# Altium PCB Copy of PCB1.PcbDoc (part 7 of 9)
Units mm, origin at the board's own origin, x right, y up, seen from the top; angles counter-clockwise.
Board outline 100 x 100 mm, 6 copper layers (Top Layer, Int1 (GND), Int2 (Sign), Int3 (Sign), Int4 (PWR), Bottom Layer), stack 1.538 mm thick; 614 components, 712 nets, 3013 pads, 501 vias.
Unrouted connection lines stored in the file: 259.
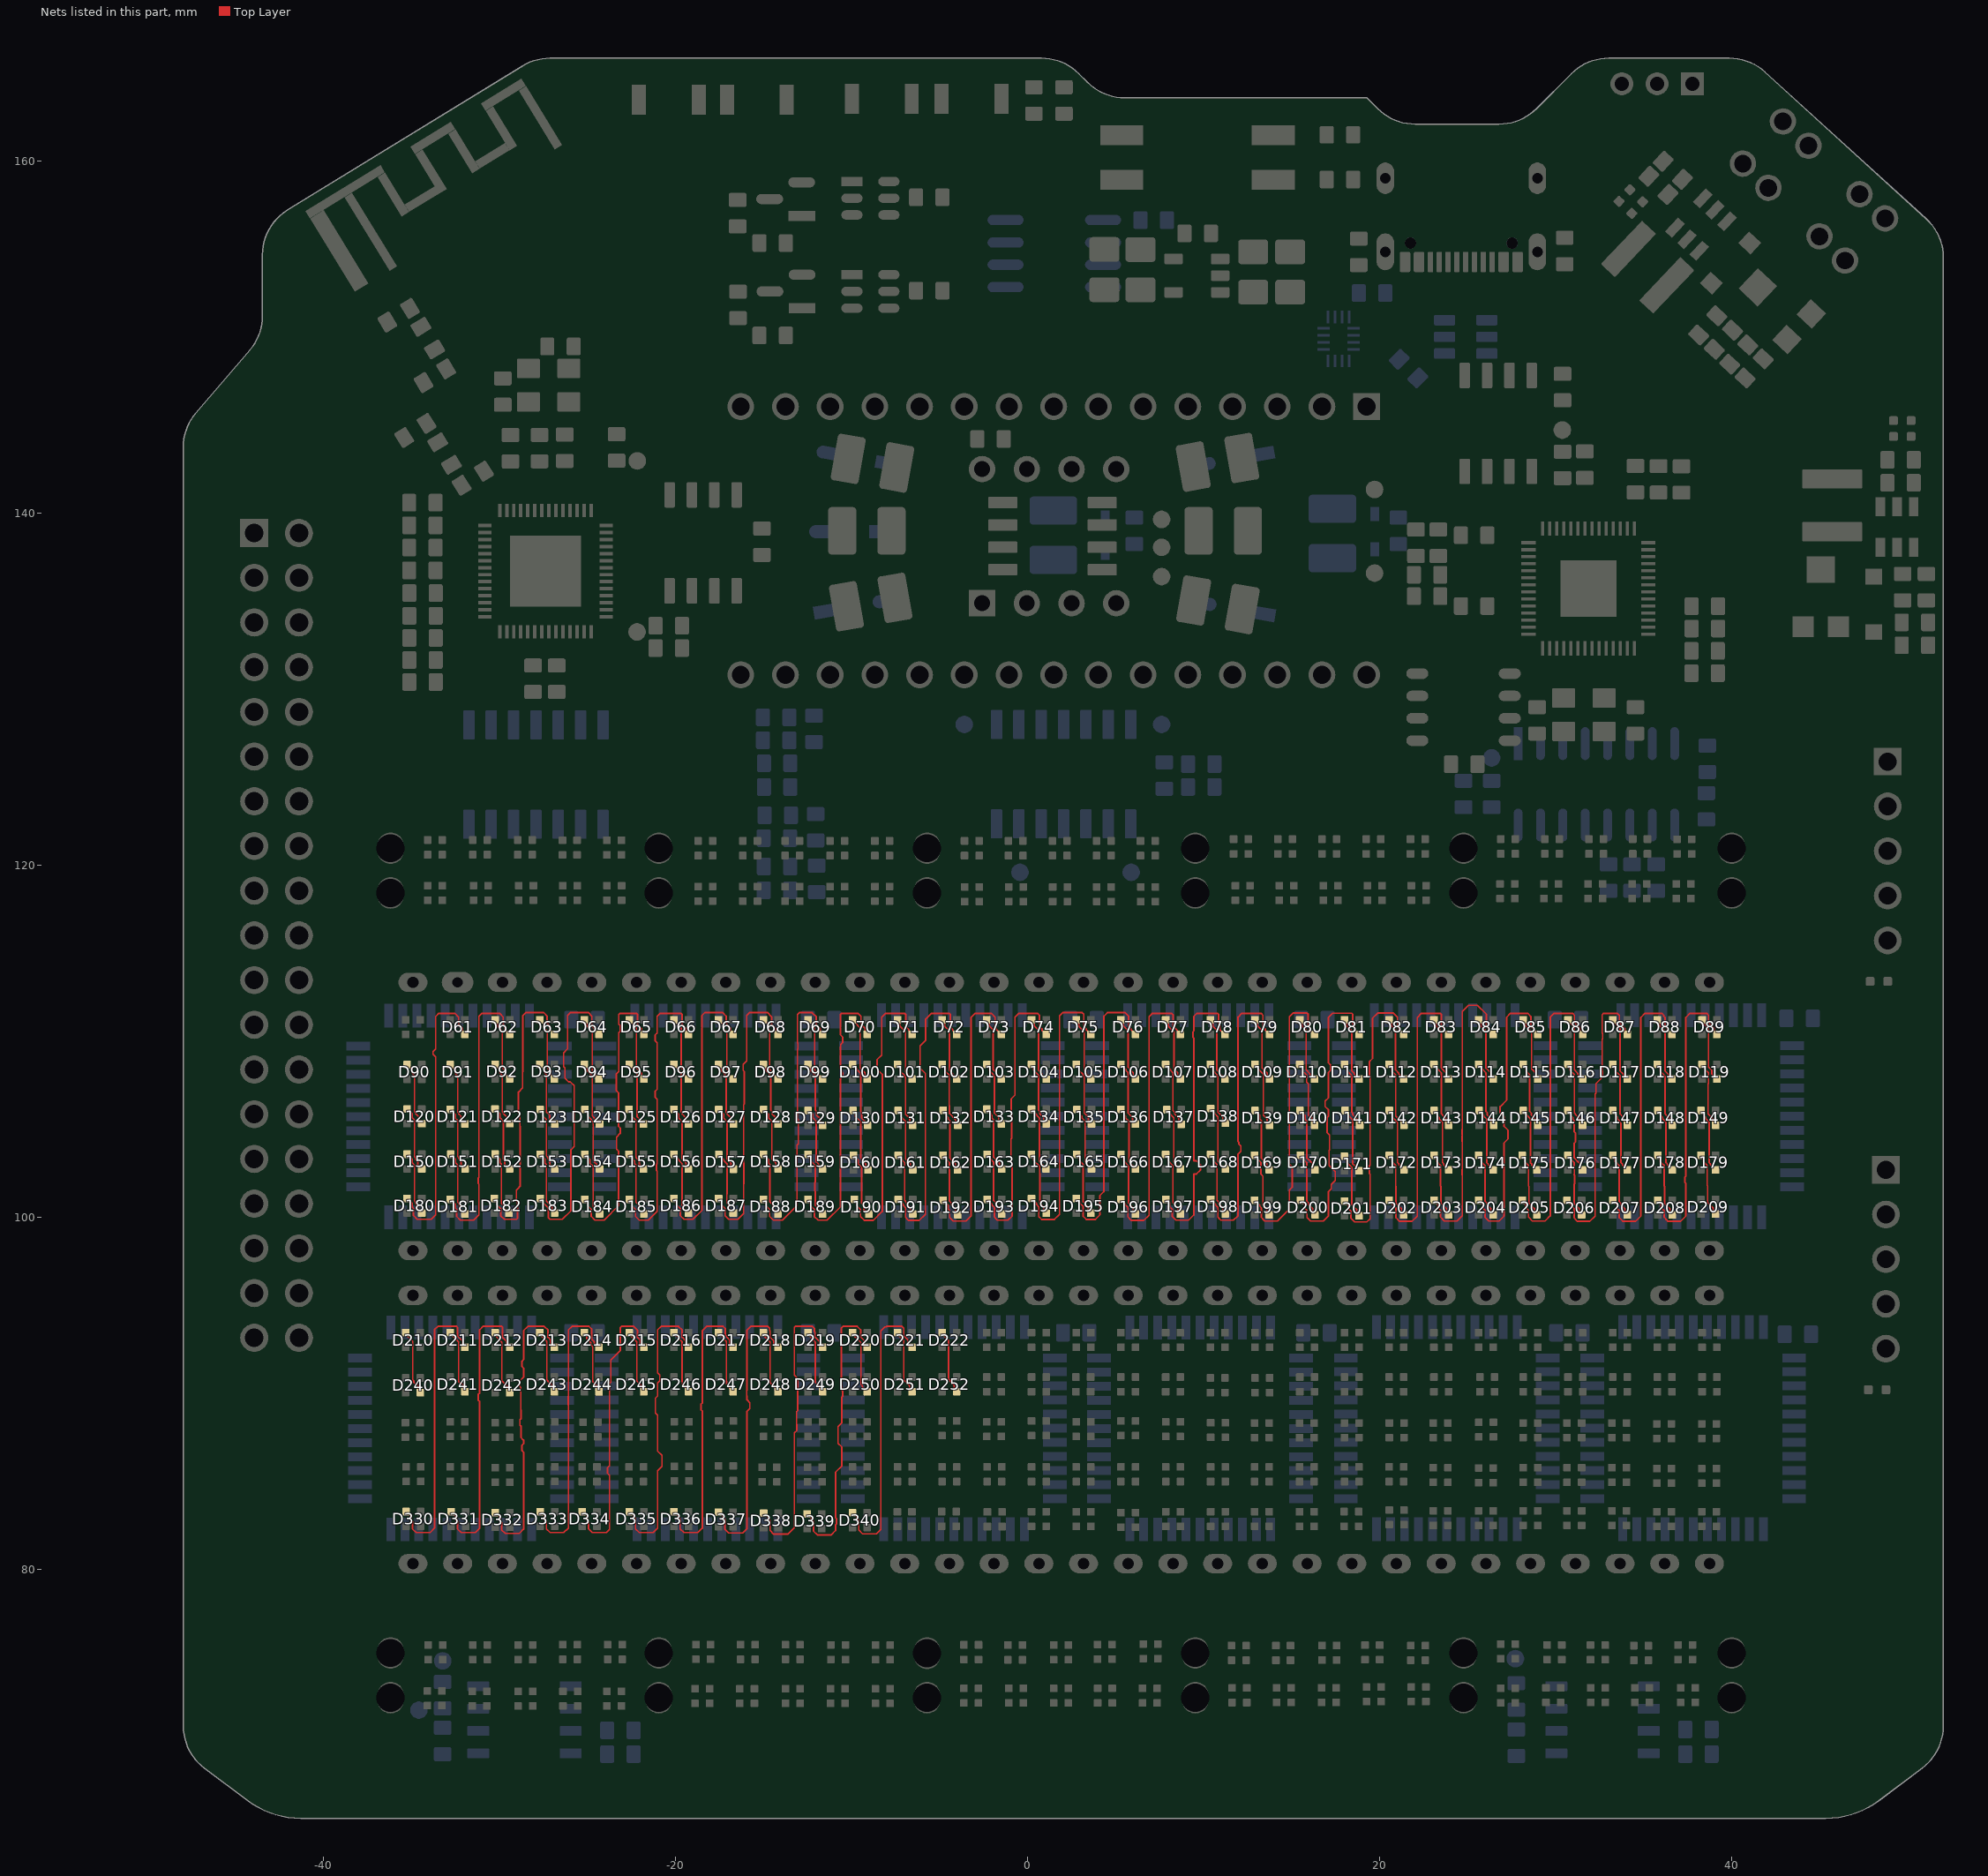
[diagram p10: the nets of this part, all layers, seen from the top]

## Via types
v1: diameter 0.4, hole 0.3, Top Layer to Bottom Layer, tented both sides, 494 vias
v2: diameter 0.4, hole 0.3, Top Layer to Bottom Layer, 5 vias
v3: diameter 0.4, hole 0.3, Top Layer to Bottom Layer, tented top, 1 vias
v4: diameter 0.6, hole 0.5, Top Layer to Bottom Layer, 1 vias

## Nets (pads, with @x,y where several pads share a name; then routed paths per layer and width w, separated by ;. In a path a pad name is that pad's centre, name@x,y a point inside that pad or via, vN(x,y) a via of type N, cw(c..) or ccw(c..) an arc to the next point about the centre after c; other vN are vias at no path point) (continued)
NetD61_3: D61.4 D180.1 | length 16.4
  Top Layer w0.09: D180.1@-35.26,101.083 -34.98,100.803 -34.98,100.589 -34.9,100.509 -34.9,100.107 -34.687,99.893 -33.892,99.893 -33.645,100.14 -33.645,109.129 -33.794,109.278 -33.794,109.42 -33.645,109.569 -33.645,111.415 -33.469,111.591 -32.551,111.591 -32.337,111.377 -32.337,110.975 -32.115,110.752 -32.115,110.571 -32.104,110.56 D61.4@-32.083,110.56
NetD62_1: D62.1 D92.4 | length 3.7
  Top Layer w0.09: D62.1@-30.267,111.231 -30.13,111.093 -30.13,110.879 -29.907,110.657 -29.907,110.602 -29.852,110.547 -29.852,108.557 -29.797,108.502 -29.797,108.447 -29.662,108.312 -29.662,108.099 D92.4@-29.437,107.874
NetD62_3: D62.4 D181.1 | length 16.6
  Top Layer w0.09: D181.1@-32.81,101.033 -32.53,100.753 -32.53,100.539 -32.45,100.459 -32.45,100.057 -32.237,99.843 -31.482,99.843 -31.185,100.14 -31.185,101.888 -31.221,101.924 -31.221,102.232 -31.185,102.269 -31.185,111.42 -31.011,111.594 -30.014,111.594 -29.809,111.389 -29.809,110.987 -29.717,110.895 -29.717,110.681 D62.4@-29.437,110.401
NetD63_1: D63.1 D93.4 | length 3.7
  Top Layer w0.09: D63.1@-27.727,111.231 -27.499,111.002 -27.499,110.789 -27.367,110.657 -27.367,110.578 -27.295,110.506 -27.295,108.54 -27.257,108.502 -27.257,108.447 -27.105,108.295 -27.105,108.089 D93.4@-26.88,107.864
NetD63_3: D63.4 D182.1 | length 16.7
  Top Layer w0.09: D182.1@-30.31,101.08 -30.172,100.942 -30.172,100.728 -29.95,100.506 -29.95,100.104 -29.736,99.89 -29.045,99.89 -28.992,99.943 -28.992,100.864 -29.057,100.929 -29.057,101.556 -28.956,101.657 ; -28.956,101.657 -28.848,101.765 -28.848,105.167 -28.854,105.172 -28.854,105.866 -28.939,105.951 -28.939,107.123 -28.703,107.359 -28.703,108.267 -28.697,108.273 -28.685,108.286 -28.685,111.467 -28.511,111.641 -27.514,111.641 -27.309,111.436 -27.309,111.026 -27.177,110.895 -27.177,110.681 D63.4@-26.897,110.401
NetD64_1: D64.1 D94.4 | length 3.7
  Top Layer w0.09: D64.1@-25.16,111.221 -25.05,111.11 -25.05,110.879 -24.827,110.657 -24.827,110.602 -24.745,110.52 -24.745,108.304 -24.555,108.114 -24.555,108.089 -24.527,108.061 -24.527,108.031 D94.4@-24.36,107.864
NetD64_3: D64.4 D183.1 | length 17.1
  Top Layer w0.09: D183.1@-27.708,101.08 -27.54,100.913 -27.54,100.85 -27.24,100.55 -27.24,99.987 -27.143,99.89 -26.442,99.89 -25.96,100.371 -25.96,103.837 -25.776,104.021 -25.776,107.487 -25.994,107.705 -26.092,107.705 -26.293,107.906 -26.293,108.487 -26.375,108.568 -26.375,109.352 -26.145,109.582 -26.145,111.467 -25.971,111.641 -24.974,111.641 -24.769,111.436 -24.769,110.867 -24.637,110.736 -24.637,110.681 D64.4@-24.357,110.401
NetD65_1: D65.1 D95.4 | length 3.7
  Top Layer w0.09: D65.1@-22.621,111.181 -22.598,111.181 -22.477,111.061 -22.477,111.038 -22.367,110.928 -22.367,110.896 -22.232,110.761 -22.232,108.49 -21.955,108.212 -21.955,107.959 D95.4@-21.82,107.824
NetD65_3: D65.4 D184.1 | length 16.8
  Top Layer w0.09: D184.1@-25.129,101.033 -25.023,100.926 -25.023,100.681 -24.8,100.459 -24.8,100.057 -24.587,99.843 -24.074,99.843 -23.25,100.667 -23.25,103.765 -23.362,103.877 -23.362,104.565 -23.154,104.773 -23.154,105.081 -23.25,105.177 -23.25,107.074 -23.374,107.198 -23.374,108.161 -23.235,108.301 -23.235,110.497 -23.148,110.584 -23.148,110.892 -23.235,110.978 -23.235,111.534 -23.175,111.594 -22.23,111.594 -22.177,111.541 -22.177,110.975 -21.955,110.752 -21.955,110.53 D65.4@-21.779,110.354
NetD66_1: D66.1 D96.4 | length 3.7
  Top Layer w0.09: D66.1@-20.107,111.206 -20.082,111.206 -19.937,111.061 -19.937,111.036 -19.827,110.926 -19.827,110.896 -19.692,110.761 -19.692,108.49 -19.502,108.299 -19.502,108.074 D96.4@-19.277,107.849
NetD66_3: D66.4 D185.1 | length 16.8
  Top Layer w0.09: D185.1@-22.616,101.033 -22.51,100.926 -22.51,100.681 -22.287,100.459 -22.287,100.057 -22.074,99.843 -21.561,99.843 -21.053,100.351 -21.053,102.626 -21.102,102.675 -21.102,102.983 -21.085,103 -21.085,103.028 -21.053,103.06 -21.053,106.723 -21.177,106.847 -21.177,107.155 -21.053,107.278 -21.053,109.928 -21.177,110.051 -21.177,110.36 -21.053,110.483 -21.053,111.42 -20.879,111.594 -19.694,111.594 -19.637,111.537 -19.637,110.975 -19.415,110.752 -19.415,110.503 D66.4@-19.266,110.354
NetD67_1: D67.1 D97.4 | length 3.7
  Top Layer w0.09: D67.1@-17.557,111.206 -17.542,111.206 -17.397,111.061 -17.397,111.046 -17.287,110.936 -17.287,110.737 -17.097,110.547 -17.097,108.435 -17.017,108.355 -17.017,108.139 -16.909,108.031 -16.907,108.031 -16.727,107.851 D97.4@-16.727,107.849
NetD67_3: D67.4 D186.1 | length 16.5
  Top Layer w0.09: D186.1@-20.076,101.083 -19.97,100.976 -19.97,100.731 -19.747,100.509 -19.747,100.107 -19.534,99.893 -19.021,99.893 -18.513,100.401 -18.513,111.47 -18.339,111.644 -17.343,111.644 -17.138,111.439 -17.138,111.055 -17.097,111.015 -17.097,110.975 -16.875,110.752 -16.875,110.553 D67.4@-16.726,110.404
NetD68_1: D68.1 D98.4 | length 3.7
  Top Layer w0.09: D68.1@-15.012,111.219 -15.012,111.215 -14.857,111.061 -14.853,111.061 -14.747,110.955 -14.747,110.737 -14.667,110.657 -14.667,108.404 -14.472,108.209 -14.472,108.152 -14.364,108.044 -14.362,108.044 -14.182,107.864 D98.4@-14.182,107.862
NetD68_3: D68.4 D187.1 | length 16.5
  Top Layer w0.09: D187.1@-17.532,101.082 -17.425,100.975 -17.425,100.73 -17.203,100.508 -17.203,100.105 -16.989,99.892 -16.477,99.892 -16.143,100.225 -16.143,101.891 -16.139,101.896 -16.139,103.09 -16.143,103.094 -16.143,106.402 -16.108,106.438 -16.108,108.294 -16.168,108.355 -16.168,108.692 -15.969,108.891 -15.969,111.469 -15.795,111.643 -14.798,111.643 -14.557,111.402 -14.557,110.975 -14.335,110.752 -14.335,110.556 D68.4@-14.182,110.402
NetD69_1: D69.1 D99.4 | length 3.7
  Top Layer w0.09: D69.1@-12.487,111.222 -12.479,111.222 -12.317,111.061 -12.317,111.052 -12.207,110.942 -12.207,110.896 -12.105,110.794 -12.105,108.37 -11.882,108.147 -11.882,108.086 -11.662,107.865 D99.4@-11.657,107.865
NetD69_3: D69.4 D188.1 | length 16.4
  Top Layer w0.09: D188.1@-14.996,101.033 -14.89,100.926 -14.89,100.681 -14.667,100.459 -14.667,100.057 -14.454,99.843 -13.941,99.843 -13.117,100.667 -13.117,104.1 -13.039,104.178 -13.039,105.573 -13.09,105.624 -13.09,109.55 -13.061,109.579 -13.061,109.887 -13.09,109.915 -13.09,111.531 -12.987,111.634 -12.254,111.634 -12.017,111.397 -12.017,110.975 -11.795,110.752 -11.795,110.503 D69.4@-11.646,110.354
NetD70_1: D70.1 D100.4 | length 3.7
  Top Layer w0.09: D70.1@-9.91,111.171 -9.887,111.171 -9.777,111.061 -9.777,111.038 -9.667,110.928 -9.667,110.896 -9.532,110.761 -9.532,108.49 -9.255,108.212 -9.255,107.99 D100.4@-9.08,107.816
NetD70_3: D70.4 D189.1 | length 16.6
  Top Layer w0.09: D189.1@-12.456,101.032 -12.35,100.925 -12.35,100.68 -12.127,100.458 -12.127,100.056 -11.914,99.842 -11.401,99.842 -10.641,100.602 -10.641,107.852 cw(c-10.551,107.852) -10.617,107.913 ccw(c-10.891,108.166) -10.618,108.419 cw(c-10.551,108.479) -10.641,108.479 -10.641,109.696 -10.628,109.709 -10.628,109.831 -10.519,109.941 -10.519,110.249 -10.641,110.372 -10.641,111.541 -10.589,111.593 -9.643,111.593 -9.477,111.428 -9.477,110.975 -9.255,110.752 -9.255,110.502 D70.4@-9.106,110.353
NetD71_1: D71.1 D101.4 | length 3.7
  Top Layer w0.09: D71.1@-7.36,111.171 -7.27,111.08 -7.27,110.879 -7.047,110.657 -7.047,110.643 -6.945,110.541 -6.945,108.285 -6.821,108.161 -6.821,108.104 -6.712,107.996 -6.711,107.996 D101.4@-6.53,107.816
NetD71_3: D71.4 D190.1 | length 16.8
  Top Layer w0.09: D190.1@-9.829,101.023 -9.723,100.916 -9.723,100.671 -9.5,100.449 -9.5,100.047 -9.287,99.833 -8.774,99.833 -8.266,100.341 -8.266,108.132 -8.565,108.431 -8.565,108.958 -8.304,109.22 -8.304,111.373 -8.092,111.584 -7.67,111.584 -7.664,111.591 -7.151,111.591 -7.144,111.584 -6.99,111.584 -6.937,111.531 -6.937,110.975 -6.891,110.928 -6.891,110.81 -6.759,110.679 -6.759,110.624 D71.4@-6.479,110.344
NetD72_1: D72.1 D102.4 | length 3.7
  Top Layer w0.09: D72.1@-4.81,111.171 -4.73,111.09 -4.73,110.879 -4.452,110.602 -4.452,108.342 -4.271,108.161 -4.271,108.104 -4.162,107.996 -4.161,107.996 D102.4@-3.98,107.816
NetD72_3: D72.4 D191.1 | length 16.8
  Top Layer w0.09: D191.1@-7.329,100.992 -7.08,100.743 -7.08,100.688 -6.945,100.553 -6.945,100.013 -6.89,99.958 -6.89,99.937 -6.787,99.833 -6.17,99.833 -5.822,100.181 -5.822,108.181 -6.117,108.476 -6.117,109.748 -5.803,110.062 -5.803,111.27 -5.488,111.584 -5.13,111.584 -5.124,111.591 -4.611,111.591 -4.604,111.584 -4.45,111.584 -4.397,111.531 -4.397,110.975 -4.391,110.968 -4.391,110.81 -4.259,110.679 -4.259,110.624 D72.4@-3.979,110.344
NetD73_1: D73.1 D103.4 | length 3.7
  Top Layer w0.09: D73.1@-2.31,111.211 -2.19,111.09 -2.19,110.879 -1.967,110.657 -1.967,108.397 -1.771,108.201 -1.771,108.144 -1.662,108.036 -1.661,108.036 D103.4@-1.48,107.856
NetD73_3: D73.4 D192.1 | length 16.6
  Top Layer w0.09: D192.1@-4.779,100.983 -4.779,100.952 -4.53,100.703 -4.53,100.489 -4.438,100.397 -4.438,99.995 -4.237,99.793 -3.513,99.793 -3.216,100.09 -3.216,111.37 -2.995,111.591 -2.071,111.591 -1.857,111.377 -1.857,110.975 -1.841,110.958 -1.841,110.799 -1.777,110.736 -1.777,110.681 -1.429,110.332 D73.4@-1.429,110.304
NetD74_1: D74.1 D104.4 | length 3.7
  Top Layer w0.09: D74.1@0.2,111.228 0.365,111.064 0.365,110.881 0.615,110.63 0.615,108.343 0.805,108.153 0.805,108.098 1.03,107.873 D104.4@1.03,107.871
NetD74_3: D74.4 D193.1 | length 16.6
  Top Layer w0.09: D193.1@-2.31,101.033 -2.03,100.753 -2.03,100.698 -1.896,100.564 -1.896,100.024 -1.84,99.968 -1.84,99.947 -1.737,99.843 -1.125,99.843 -0.893,100.075 -0.893,103.093 -0.95,103.15 -0.95,104.453 -0.91,104.493 -0.91,105.859 -0.944,105.892 -0.944,106.735 -0.729,106.95 -0.729,111.379 -0.514,111.594 0.553,111.594 0.659,111.487 0.659,110.855 0.805,110.709 0.805,110.624 0.858,110.571 0.873,110.571 D74.4@1.071,110.372
NetD75_1: D75.1 D105.4 | length 3.7
  Top Layer w0.09: D75.1@2.79,111.221 2.89,111.12 2.89,110.879 3.113,110.657 3.113,110.606 3.205,110.514 3.205,108.335 3.329,108.211 3.329,108.154 3.438,108.046 3.439,108.046 3.62,107.866 D105.4@3.62,107.864
NetD75_3: D75.4 D194.1 | length 16.6
  Top Layer w0.09: D194.1@0.244,101.042 0.493,100.793 0.493,100.738 0.628,100.603 0.628,100.042 0.786,99.883 1.51,99.883 1.807,100.18 1.807,111.46 1.981,111.634 3.089,111.634 3.182,111.541 3.182,110.86 3.314,110.729 3.314,110.674 D75.4@3.594,110.394
NetD76_1: D76.1 D106.4 | length 3.7
  Top Layer w0.09: D76.1@5.29,111.211 5.43,111.07 5.43,110.879 5.653,110.657 5.653,110.606 5.705,110.554 5.705,108.537 5.763,108.479 5.763,108.435 5.985,108.212 5.985,107.99 D106.4@6.12,107.856
NetD76_3: D76.4 D195.1 | length 16.4
  Top Layer w0.09: D195.1@2.784,101.042 2.96,100.866 2.96,100.811 3.15,100.621 3.15,100.06 3.326,99.883 3.839,99.883 4.098,100.142 4.098,101.241 4.321,101.465 4.321,111.434 4.521,111.634 5.536,111.634 5.722,111.447 5.722,110.86 5.854,110.729 5.854,110.674 D76.4@6.134,110.394
NetD77_1: D77.1 D107.4 | length 3.7
  Top Layer w0.09: D77.1@7.833,111.211 7.976,111.068 7.976,110.881 8.303,110.554 8.303,108.435 8.525,108.212 8.525,107.999 D107.4@8.663,107.861
NetD77_3: D77.4 D196.1 | length 16.7
  Top Layer w0.09: D196.1@5.324,101.023 5.324,100.992 5.536,100.779 5.536,100.724 5.687,100.573 5.687,100.034 5.763,99.958 5.763,99.937 5.866,99.833 6.59,99.833 6.887,100.13 6.887,111.41 7.061,111.584 7.57,111.584 7.576,111.591 8.089,111.591 8.096,111.584 8.182,111.584 8.262,111.504 8.262,110.863 8.493,110.633 8.493,110.624 8.493,110.525 D77.4@8.674,110.344
NetD78_1: D78.1 D108.4 | length 3.7
  Top Layer w0.09: D78.1@10.39,111.211 10.51,111.09 10.51,110.879 10.733,110.657 10.733,108.397 10.929,108.201 10.929,108.144 11.038,108.036 11.039,108.036 D108.4@11.22,107.856
NetD78_3: D78.4 D197.1 | length 17.2
  Top Layer w0.09: D197.1@7.871,101.033 7.871,101.002 8.06,100.813 8.06,100.599 8.212,100.447 8.212,100.045 8.413,99.843 9.137,99.843 9.434,100.14 9.434,102.467 9.588,102.467 9.806,102.685 9.806,102.993 9.588,103.211 9.434,103.211 9.434,110.192 9.387,110.238 9.387,110.547 9.434,110.594 9.434,111.42 9.602,111.588 10.114,111.588 10.116,111.591 10.782,111.591 10.843,111.53 10.843,110.975 10.923,110.895 10.923,110.652 11.004,110.571 11.033,110.571 D78.4@11.221,110.382
NetD79_1: D79.1 D109.4 | length 3.7
  Top Layer w0.09: D79.1@12.89,111.171 12.944,111.171 13.054,111.061 13.054,110.881 13.305,110.63 13.305,108.497 13.591,108.211 13.591,107.944 D109.4@13.72,107.816
NetD79_3: D79.4 D198.1 | length 16.8
  Top Layer w0.09: D198.1@10.39,101.033 10.67,100.753 10.67,100.698 10.805,100.563 10.805,100.023 10.86,99.968 10.86,99.947 10.963,99.843 11.09,99.843 11.404,99.843 11.687,99.843 11.946,100.102 11.946,103.595 12.101,103.75 12.101,104.059 11.999,104.16 11.999,104.249 11.946,104.302 11.946,111.382 12.158,111.594 13.255,111.594 13.359,111.489 13.359,110.844 13.495,110.709 13.495,110.63 13.554,110.571 13.573,110.571 D79.4@13.771,110.372
NetD80_1: D80.1 D110.4 | length 3.7
  Top Layer w0.09: D80.1@15.49,111.171 15.59,111.07 15.59,110.879 15.813,110.657 15.813,108.386 16.026,108.172 16.026,108.117 D110.4@16.32,107.824
NetD80_3: D80.4 D199.1 | length 16.6
  Top Layer w0.09: D199.1@12.921,100.952 13.17,100.703 13.17,100.648 13.271,100.547 13.271,100.007 13.36,99.918 13.36,99.897 13.463,99.793 14.187,99.793 14.86,100.466 14.86,101.552 15.019,101.711 15.019,102.878 14.86,103.038 14.86,107.296 14.866,107.301 14.866,111.404 15.072,111.611 15.87,111.611 15.923,111.558 15.923,110.975 16.003,110.895 16.003,110.627 16.059,110.571 16.113,110.571 D80.4@16.271,110.412
NetD81_1: D81.1 D111.4 | length 3.6
  Top Layer w0.09: D81.1@17.99,111.111 18.08,111.111 18.13,111.061 18.13,110.879 18.353,110.657 18.353,110.553 18.405,110.501 18.405,108.334 18.543,108.196 18.543,108.141 D111.4@18.82,107.864
NetD81_3: D81.4 D200.1 | length 17.3
  Top Layer w0.09: D200.1@15.521,100.952 15.77,100.703 15.77,100.489 15.862,100.397 15.862,99.995 16.063,99.793 16.787,99.793 17.084,100.09 17.084,101.469 17.242,101.628 17.242,101.884 17.469,102.111 17.469,102.607 17.118,102.958 17.118,103.801 17.143,103.826 17.143,104.687 17.012,104.818 17.012,105.679 17.084,105.751 17.084,106.103 16.889,106.298 16.889,106.606 17.084,106.801 17.084,108.24 17.2,108.356 17.2,108.664 17.084,108.78 17.084,111.37 17.32,111.606 18.394,111.606 18.463,111.538 18.463,110.975 18.543,110.895 18.543,110.672 18.644,110.571 18.653,110.571 D81.4@18.871,110.352
NetD82_1: D82.1 D112.4 | length 3.7
  Top Layer w0.09: D82.1@20.56,111.171 20.67,111.061 20.67,110.879 20.893,110.657 20.893,108.386 21.083,108.196 21.083,108.141 D112.4@21.37,107.854
NetD82_3: D82.4 D201.1 | length 16.6
  Top Layer w0.09: D201.1@18.024,100.902 18.215,100.711 18.215,100.497 18.365,100.347 18.365,99.945 18.566,99.743 19.262,99.743 19.447,99.927 19.447,102.461 19.407,102.502 19.407,102.932 19.447,102.972 19.447,108.022 19.41,108.059 19.41,108.211 19.41,108.854 19.587,109.031 19.587,111.32 19.877,111.611 20.769,111.611 21.003,111.377 21.003,110.816 21.083,110.736 21.083,110.681 D82.4@21.374,110.389
NetD83_1: D83.1 D113.4 | length 3.7
  Top Layer w0.09: D83.1@23.09,111.171 23.1,111.171 23.21,111.061 23.21,110.879 23.433,110.657 23.433,110.57 23.505,110.498 23.505,108.497 23.543,108.459 23.543,108.435 23.765,108.212 23.765,107.97 D113.4@23.92,107.816
NetD83_3: D83.4 D202.1 | length 16.7
  Top Layer w0.09: D202.1@20.564,100.973 20.564,100.942 20.731,100.774 20.731,100.72 20.913,100.538 20.913,99.998 21.003,99.908 21.003,99.887 21.106,99.783 21.83,99.783 22.127,100.08 22.127,111.36 22.358,111.591 23.446,111.591 23.502,111.534 23.502,110.856 23.55,110.808 23.623,110.736 23.623,110.681 D83.4@23.903,110.401 23.914,110.389 D83.4@23.914,110.294
NetD84_1: D84.1 D114.4 | length 3.7
  Top Layer w0.09: D84.1@25.613,111.161 25.65,111.161 25.75,111.061 25.75,110.879 25.973,110.657 25.973,110.588 26.028,110.533 26.028,108.487 26.304,108.211 26.304,107.944 D114.4@26.443,107.806
NetD84_3: D84.4 D203.1 | length 17.2
  Top Layer w0.09: D203.1@23.121,100.952 23.288,100.784 23.288,100.571 23.45,100.409 23.45,100.028 23.56,99.918 23.56,99.897 23.663,99.793 24.387,99.793 24.684,100.09 24.684,102.399 24.675,102.408 24.675,102.716 24.684,102.724 24.684,104.304 24.675,104.312 24.675,104.621 24.684,104.629 24.684,104.676 24.675,104.684 24.675,104.993 24.684,105.001 24.684,111.701 25.034,112.051 25.547,112.051 26.059,111.538 26.059,110.839 26.094,110.804 26.182,110.716 26.182,110.659 26.27,110.571 26.273,110.571 D84.4@26.471,110.372
NetD85_1: D85.1 D115.4 | length 3.8
  Top Layer w0.09: D85.1@28.09,111.161 28.19,111.161 28.29,111.061 28.29,110.879 28.623,110.547 28.623,108.435 28.845,108.212 28.845,107.88 D115.4@28.92,107.806
NetD85_3: D85.4 D204.1 | length 16.9
  Top Layer w0.09: D204.1@25.644,100.952 25.893,100.703 25.893,100.489 25.985,100.397 25.985,99.995 26.186,99.793 26.782,99.793 27.057,100.067 27.057,104.227 27.284,104.454 27.284,104.95 27.057,105.177 27.057,105.722 26.835,105.944 26.835,106.295 27.207,106.667 27.207,111.37 27.428,111.591 28.409,111.591 28.513,111.487 28.513,111.48 28.582,111.41 28.582,110.856 28.813,110.626 28.813,110.624 28.813,110.485 D85.4@28.994,110.304
NetD86_1: D86.1 D116.4 | length 3.7
  Top Layer w0.09: D86.1@30.69,111.161 31.05,110.801 31.05,110.66 31.053,110.657 31.053,108.386 31.243,108.196 31.243,108.141 31.52,107.864 D116.4@31.52,107.806
NetD86_3: D86.4 D205.1 | length 16.7
  Top Layer w0.09: D205.1@28.121,100.952 28.288,100.784 28.288,100.571 28.45,100.409 28.45,100.028 28.56,99.918 28.56,99.897 28.663,99.793 29.387,99.793 29.684,100.09 29.684,111.37 29.905,111.591 30.949,111.591 31.053,111.487 31.053,111.085 31.385,110.752 31.385,110.39 D86.4@31.471,110.304
NetD87_1: D87.1 D117.4 | length 3.7
  Top Layer w0.09: D87.1@33.24,111.161 33.648,110.753 33.648,108.331 33.845,108.134 33.845,108.079 34.07,107.854 D117.4@34.07,107.806
NetD87_3: D87.4 D206.1 | length 16.6
  Top Layer w0.09: D206.1@30.64,100.973 30.86,100.753 30.86,100.698 31.05,100.508 31.05,99.968 31.11,99.908 31.11,99.887 31.213,99.783 31.937,99.783 32.234,100.08 32.234,107.021 32.284,107.071 32.284,107.601 32.664,107.981 32.664,108.289 32.637,108.316 32.637,110.113 32.664,110.14 32.664,110.448 32.637,110.474 32.637,111.512 32.716,111.591 33.489,111.591 33.609,111.47 33.609,111.068 33.925,110.752 33.925,110.39 D87.4@34.021,110.294
NetD88_1: D88.1 D118.4 | length 3.7
  Top Layer w0.09: D88.1@35.79,111.171 35.8,111.171 35.91,111.061 35.91,110.879 36.133,110.657 36.133,110.57 36.205,110.498 36.205,108.314 36.433,108.086 36.433,108.003 D118.4@36.62,107.816
NetD88_3: D88.4 D207.1 | length 16.7
  Top Layer w0.09: D207.1@33.264,100.973 33.264,100.942 33.513,100.693 33.513,100.479 33.605,100.387 33.605,99.985 33.806,99.783 34.53,99.783 34.827,100.08 34.827,111.36 35.058,111.591 36.029,111.591 36.133,111.487 36.133,111.437 36.202,111.367 36.202,110.856 36.25,110.808 36.323,110.736 36.323,110.681 36.614,110.389 D88.4@36.614,110.294
NetD89_1: D89.1 D119.4 | length 3.7
  Top Layer w0.09: D89.1@38.24,111.171 38.673,110.738 38.673,108.545 38.863,108.355 38.863,108.141 39.07,107.934 D119.4@39.07,107.816
NetD89_3: D89.4 D208.1 | length 16.7
  Top Layer w0.09: D208.1@35.821,100.942 35.988,100.774 35.988,100.561 36.15,100.399 36.15,100.018 36.26,99.908 36.26,99.887 36.363,99.783 37.087,99.783 37.384,100.08 37.384,101.935 37.338,101.981 37.338,102.289 37.384,102.335 37.384,111.36 37.615,111.591 38.569,111.591 38.673,111.487 38.673,111.085 39.005,110.752 39.005,110.46 D89.4@39.171,110.294
NetD90_1: D90.1 D120.4 | length 3.5
  Top Layer w0.09: D90.1@-35.26,108.683 -34.98,108.403 -34.98,108.189 -34.845,108.054 -34.845,106.011 -34.79,105.956 -34.79,105.902 -34.568,105.679 -34.568,105.498 -34.538,105.468 D120.4@-34.53,105.468
NetD91_1: D91.1 D121.4 | length 3.7
  Top Layer w0.09: D91.1@-32.81,108.683 -32.53,108.403 -32.53,108.189 -32.392,108.051 -32.392,105.994 -32.34,105.942 -32.34,105.887 -32.202,105.749 -32.202,105.535 D121.4@-31.98,105.313
NetD92_1: D92.1 D122.4 | length 3.7
  Top Layer w0.09: D92.1@-30.267,108.704 -29.987,108.424 -29.987,108.21 -29.852,108.075 -29.852,106.008 -29.801,105.956 -29.801,105.902 -29.611,105.712 -29.611,105.498 D122.4@-29.441,105.328
NetD93_1: D93.1 D123.4 | length 3.8
  Top Layer w0.09: D93.1@-27.71,108.694 -27.71,108.687 -27.447,108.424 -27.447,108.352 -27.43,108.335 -27.43,108.193 -27.35,108.113 -27.35,105.987 -27.16,105.797 -27.16,105.526 -27.108,105.473 -27.039,105.473 D123.4@-26.884,105.318
NetD94_1: D94.1 D124.4 | length 3.7
  Top Layer w0.09: D94.1@-25.16,108.694 -25.05,108.583 -25.05,108.339 -24.745,108.035 -24.745,105.773 -24.61,105.638 -24.61,105.595 -24.5,105.485 -24.5,105.473 -24.345,105.318 D124.4@-24.334,105.318
NetD95_1: D95.1 D125.4 | length 3.7
  Top Layer w0.09: D95.1@-22.61,108.654 -22.422,108.466 -22.422,108.411 -22.206,108.194 -22.206,105.733 -22.071,105.598 -22.071,105.555 -21.961,105.445 -21.961,105.433 D125.4@-21.806,105.278
NetD96_1: D96.1 D126.4 | length 3.7
  Top Layer w0.09: D96.1@-20.095,108.679 -19.882,108.466 -19.882,108.411 -19.692,108.221 -19.692,105.983 -19.64,105.932 -19.64,105.877 -19.45,105.687 -19.45,105.473 D126.4@-19.28,105.303
NetD97_1: D97.1 D127.4 | length 3.7
  Top Layer w0.09: D97.1@-17.557,108.679 -17.43,108.551 -17.43,108.339 -17.207,108.117 -17.207,108.06 -17.142,107.995 -17.142,105.983 -17.09,105.932 -17.09,105.877 -16.9,105.687 -16.9,105.473 D127.4@-16.73,105.303
NetD98_1: D98.1 D128.4 | length 3.7
  Top Layer w0.09: D98.1@-15.012,108.692 -14.884,108.565 -14.884,108.353 -14.662,108.13 -14.662,108.074 -14.597,108.008 -14.597,106.086 -14.54,106.029 -14.54,105.877 -14.437,105.773 -14.408,105.773 -14.355,105.72 -14.355,105.486 D128.4@-14.185,105.316
NetD99_1: D99.1 D129.4 | length 3.7
  Top Layer w0.09: D99.1@-12.487,108.695 -12.36,108.568 -12.36,108.356 -12.072,108.068 -12.072,106.089 -12.014,106.03 -12.014,105.817 -11.91,105.714 -11.883,105.714 -11.831,105.661 -11.831,105.489 D129.4@-11.661,105.319
NetD100_1: D100.1 D130.4 | length 3.7
  Top Layer w0.09: D100.1@-9.9,108.644 -9.722,108.466 -9.722,108.411 -9.495,108.184 -9.495,106.037 -9.454,105.996 -9.454,105.817 -9.439,105.802 -9.439,105.643 -9.264,105.469 -9.264,105.414 -9.118,105.268 D130.4@-9.084,105.268
NetD101_1: D101.1 D131.4 | length 3.7
  Top Layer w0.09: D101.1@-7.36,108.644 -7.233,108.516 -7.233,108.304 -7.011,108.082 -7.011,108.025 -6.945,107.96 -6.945,105.868 -6.704,105.626 -6.704,105.414 -6.558,105.268 D131.4@-6.534,105.268
NetD102_1: D102.1 D132.4 | length 3.7
  Top Layer w0.09: D102.1@-4.81,108.644 -4.683,108.516 -4.683,108.304 -4.461,108.082 -4.461,106.345 -4.445,106.33 -4.445,105.9 -4.086,105.541 -4.086,105.37 D132.4@-3.984,105.268
NetD103_1: D103.1 D133.4 | length 3.7
  Top Layer w0.09: D103.1@-2.31,108.684 -2.183,108.556 -2.183,108.344 -1.961,108.122 -1.961,108.065 -1.895,108 -1.895,105.925 -1.735,105.764 -1.706,105.764 -1.654,105.712 -1.654,105.478 D133.4@-1.484,105.308
NetD104_1: D104.1 D134.4 | length 3.7
  Top Layer w0.09: D104.1@0.2,108.701 0.328,108.574 0.328,108.362 0.615,108.074 0.615,106.095 0.683,106.028 0.683,105.895 0.905,105.672 0.905,105.448 D134.4@1.027,105.325
NetD105_1: D105.1 D135.4 | length 3.7
  Top Layer w0.09: D105.1@2.79,108.694 2.917,108.566 2.917,108.354 3.139,108.132 3.139,108.075 3.205,108.01 3.205,105.935 3.26,105.88 3.26,105.877 3.363,105.773 3.394,105.773 3.446,105.72 3.446,105.488 D135.4@3.616,105.318
NetD106_1: D106.1 D136.4 | length 3.7
  Top Layer w0.09: D106.1@5.29,108.684 5.3,108.684 5.463,108.521 5.463,108.511 5.573,108.401 5.573,108.356 5.705,108.224 5.705,105.925 5.865,105.764 5.894,105.764 5.946,105.712 5.946,105.478 D136.4@6.116,105.308
NetD107_1: D107.1 D137.4 | length 3.7
  Top Layer w0.09: D107.1@7.84,108.684 8.003,108.521 8.003,108.514 8.113,108.404 8.113,108.356 8.248,108.221 8.248,106.381 8.25,106.379 8.25,106.075 8.36,105.965 8.36,105.867 8.582,105.644 8.582,105.385 D137.4@8.659,105.308
NetD108_1: D108.1 D138.4 | length 3.7
  Top Layer w0.09: D108.1@10.39,108.684 10.517,108.556 10.517,108.344 10.739,108.122 10.739,108.065 10.805,108 10.805,105.982 11.082,105.704 11.082,105.442 D138.4@11.216,105.308
NetD109_1: D109.1 D139.4 | length 3.7
  Top Layer w0.09: D109.1@12.96,108.644 13.083,108.521 13.083,108.451 13.381,108.152 13.381,105.817 13.603,105.595 13.603,105.381 D139.4@13.716,105.268
NetD110_1: D110.1 D140.4 | length 3.8
  Top Layer w0.09: D110.1@15.49,108.644 15.617,108.516 15.617,108.304 15.701,108.221 15.709,108.221 15.836,108.093 15.836,107.691 15.94,107.587 15.94,105.817 16.044,105.714 16.094,105.714 16.146,105.661 16.146,105.438 D140.4@16.316,105.268
NetD111_1: D111.1 D141.4 | length 3.8
  Top Layer w0.09: D111.1@17.99,108.584 18.054,108.584 18.117,108.521 18.117,108.352 18.353,108.117 18.353,108.062 18.405,108.01 18.405,105.977 18.461,105.921 18.461,105.832 18.699,105.594 18.699,105.325 D141.4@18.816,105.208
NetD112_1: D112.1 D142.4 | length 3.8
  Top Layer w0.09: D112.1@20.54,108.644 20.667,108.516 20.667,108.304 20.751,108.221 20.789,108.221 20.893,108.117 20.893,108.062 20.899,108.056 20.899,105.769 21.089,105.579 21.089,105.574 21.199,105.464 21.199,105.414 21.345,105.268 D142.4@21.366,105.268
NetD113_1: D113.1 D143.4 | length 3.8
  Top Layer w0.09: D113.1@23.09,108.644 23.12,108.644 23.243,108.521 23.243,108.491 23.353,108.381 23.353,108.356 23.505,108.204 23.505,105.885 23.56,105.83 23.56,105.817 23.659,105.718 23.694,105.718 23.746,105.665 23.746,105.438 D143.4@23.916,105.268
NetD114_1: D114.1 D144.4 | length 3.8
  Top Layer w0.09: D114.1@25.613,108.634 25.67,108.634 25.783,108.521 25.783,108.464 26.028,108.219 26.028,106.027 26.11,105.945 26.11,105.817 26.332,105.594 26.332,105.365 D144.4@26.439,105.258
NetD115_1: D115.1 D145.4 | length 3.8
  Top Layer w0.09: D115.1@28.09,108.634 28.191,108.634 28.304,108.521 28.304,108.326 28.513,108.117 28.513,107.605 28.505,107.597 28.505,106.027 28.61,105.922 28.61,105.817 28.832,105.594 28.832,105.342 D145.4@28.916,105.258
NetD116_1: D116.1 D146.4 | length 3.7
  Top Layer w0.09: D116.1@30.69,108.634 30.817,108.506 30.817,108.352 31.053,108.117 31.053,105.927 31.16,105.82 31.16,105.817 31.263,105.713 31.294,105.713 31.346,105.66 31.346,105.428 D146.4@31.516,105.258
NetD117_1: D117.1 D147.4 | length 3.8
  Top Layer w0.09: D117.1@33.24,108.634 33.367,108.506 33.367,108.294 33.441,108.221 33.489,108.221 33.655,108.055 33.655,105.875 33.815,105.714 33.815,105.509 33.9,105.425 33.9,105.413 34.055,105.258 D147.4@34.066,105.258
NetD118_1: D118.1 D148.4 | length 3.8
  Top Layer w0.09: D118.1@35.79,108.644 35.917,108.516 35.917,108.304 36.001,108.221 36.029,108.221 36.133,108.117 36.133,108.089 36.205,108.017 36.205,105.885 36.26,105.83 36.26,105.817 36.359,105.718 36.394,105.718 36.446,105.665 36.446,105.438 D148.4@36.616,105.268
NetD119_1: D119.1 D149.4 | length 3.8
  Top Layer w0.09: D119.1@38.24,108.644 38.341,108.644 38.464,108.521 38.464,108.42 38.673,108.211 38.673,107.605 38.655,107.587 38.655,105.885 38.896,105.643 38.896,105.466 38.915,105.447 38.915,105.414 39.061,105.268 D149.4@39.066,105.268
NetD120_1: D120.1 D150.4 | length 3.6
  Top Layer w0.09: D120.1@-35.26,106.158 -34.98,105.878 -34.98,105.664 -34.845,105.529 -34.845,103.447 -34.79,103.392 -34.79,103.31 -34.655,103.175 -34.655,102.988 -34.536,102.869 D150.4@-34.536,102.859
NetD121_1: D121.1 D151.4 | length 3.7
  Top Layer w0.09: D121.1@-32.81,106.143 -32.53,105.863 -32.53,105.649 -32.392,105.511 -32.392,103.461 -32.323,103.392 -32.323,103.337 -32.195,103.209 -32.195,102.995 D151.4@-31.963,102.763
NetD122_1: D122.1 D152.4 | length 3.7
  Top Layer w0.09: D122.1@-30.271,106.158 -29.991,105.878 -29.991,105.664 -29.801,105.474 -29.801,103.395 -29.797,103.392 -29.797,103.337 -29.717,103.257 -29.717,103.043 D152.4@-29.437,102.763
NetD123_1: D123.1 D153.4 | length 3.7
  Top Layer w0.09: D123.1@-27.714,106.148 -27.573,106.007 -27.573,105.781 -27.35,105.559 -27.35,103.492 -27.24,103.382 -27.24,103.327 -27.16,103.247 -27.16,103.033 D153.4@-26.88,102.753
NetD124_1: D124.1 D154.4 | length 3.7
  Top Layer w0.09: D124.1@-25.164,106.148 -25.023,106.007 -25.023,105.781 -24.8,105.559 -24.8,105.516 -24.694,105.409 -24.694,103.385 -24.69,103.382 -24.69,103.327 -24.61,103.247 -24.61,103.138 -24.5,103.028 -24.5,102.923 D154.4@-24.33,102.753
NetD125_1: D125.1 D155.4 | length 3.7
  Top Layer w0.09: D125.1@-22.624,106.108 -22.483,105.967 -22.483,105.742 -22.261,105.519 -22.261,103.397 -22.071,103.207 -22.071,102.993 D155.4@-21.791,102.713
NetD126_1: D126.1 D156.4 | length 3.7
  Top Layer w0.09: D126.1@-20.11,106.133 -19.83,105.853 -19.83,105.639 -19.64,105.449 -19.64,103.327 -19.418,103.104 -19.418,102.879 D156.4@-19.277,102.738
NetD127_1: D127.1 D157.4 | length 3.7
  Top Layer w0.09: D127.1@-17.56,106.133 -17.28,105.853 -17.28,105.639 -17.09,105.449 -17.09,103.37 -17.086,103.365 -17.086,103.313 -16.863,103.091 -16.863,102.874 D157.4@-16.727,102.738
NetD128_1: D128.1 D158.4 | length 3.7
  Top Layer w0.09: D128.1@-15.015,106.146 -14.735,105.866 -14.735,105.652 -14.545,105.462 -14.545,103.383 -14.54,103.378 -14.54,103.327 -14.318,103.104 -14.318,102.888 D158.4@-14.182,102.751
NetD129_1: D129.1 D159.4 | length 3.7
  Top Layer w0.09: D129.1@-12.491,106.149 -12.211,105.869 -12.211,105.656 -12.021,105.466 -12.021,103.173 -11.882,103.034 -11.882,102.979 D159.4@-11.657,102.754
NetD130_1: D130.1 D160.4 | length 3.7
  Top Layer w0.09: D130.1@-9.914,106.098 -9.786,105.971 -9.786,105.722 -9.486,105.421 -9.486,103.377 -9.44,103.332 -9.44,103.277 -9.337,103.173 -9.333,103.173 -9.217,103.056 -9.217,102.839 D160.4@-9.08,102.703
NetD131_1: D131.1 D161.4 | length 3.7
  Top Layer w0.09: D131.1@-7.364,106.098 -7.203,105.937 -7.203,105.724 -6.945,105.466 -6.945,103.335 -6.89,103.28 -6.89,103.277 -6.787,103.173 -6.783,103.173 -6.667,103.056 -6.667,102.839 D161.4@-6.53,102.703
NetD132_1: D132.1 D162.4 | length 3.7
  Top Layer w0.09: D132.1@-4.814,106.098 -4.635,105.92 -4.635,105.782 -4.534,105.68 -4.534,105.604 -4.428,105.499 -4.428,103.368 -4.34,103.28 -4.34,103.277 -4.237,103.173 -4.233,103.173 -4.117,103.056 -4.117,102.839 D162.4@-3.98,102.703
NetD133_1: D133.1 D163.4 | length 3.7
  Top Layer w0.09: D133.1@-2.314,106.137 -2.085,105.909 -2.085,105.831 -2.034,105.779 -2.034,105.643 -1.95,105.56 -1.95,103.43 -1.84,103.32 -1.84,103.317 -1.737,103.213 -1.733,103.213 -1.617,103.096 -1.617,102.879 D163.4@-1.48,102.743
NetD134_1: D134.1 D164.4 | length 3.7
  Top Layer w0.09: D134.1@0.208,106.155 0.383,105.981 0.383,105.97 0.493,105.86 0.493,105.816 0.667,105.641 0.667,103.178 0.86,102.985 0.86,102.93 D164.4@1.03,102.76
NetD135_1: D135.1 D165.4 | length 3.7
  Top Layer w0.09: D135.1@2.786,106.148 2.96,105.975 2.96,105.851 3.066,105.744 3.066,105.654 3.256,105.464 3.256,103.171 3.34,103.088 3.34,103.033 D165.4@3.62,102.753
NetD136_1: D136.1 D166.4 | length 3.7
  Top Layer w0.09: D136.1@5.286,106.138 5.46,105.965 5.46,105.851 5.566,105.744 5.566,105.644 5.756,105.454 5.756,103.161 5.95,102.968 5.95,102.913 D166.4@6.12,102.743
NetD137_1: D137.1 D167.4 | length 3.7
  Top Layer w0.09: D137.1@7.875,106.138 8.06,105.953 8.06,105.908 8.17,105.798 8.17,105.788 8.299,105.658 8.299,103.161 8.44,103.021 8.44,102.966 D167.4@8.663,102.743
NetD138_1: D138.1 D168.4 | length 3.7
  Top Layer w0.09: D138.1@10.435,106.138 10.615,105.958 10.615,105.903 10.805,105.713 10.805,103.213 10.94,103.078 10.94,103.023 D168.4@11.22,102.743
NetD139_1: D139.1 D169.4 | length 3.7
  Top Layer w0.09: D139.1@12.886,106.098 13.166,105.818 13.166,105.604 13.271,105.5 13.271,103.368 13.36,103.28 13.36,103.277 13.463,103.173 13.467,103.173 13.583,103.056 13.583,102.839 D169.4@13.72,102.703
NetD140_1: D140.1 D170.4 | length 3.7
  Top Layer w0.09: D140.1@15.486,106.098 15.486,106.058 15.75,105.794 15.75,105.72 15.766,105.704 15.766,105.564 15.85,105.481 15.85,103.39 15.96,103.28 15.96,103.277 16.063,103.173 16.067,103.173 16.183,103.056 16.183,102.839 D170.4@16.32,102.703
NetD141_1: D141.1 D171.4 | length 3.7
  Top Layer w0.09: D141.1@18.066,106.038 18.2,105.904 18.2,105.824 18.456,105.568 18.456,103.061 18.595,102.923 18.595,102.868 D171.4@18.82,102.643
NetD142_1: D142.1 D172.4 | length 3.7
  Top Layer w0.09: D142.1@20.536,106.098 20.677,105.957 20.677,105.722 20.899,105.5 20.899,105.495 21.006,105.388 21.006,103.121 21.09,103.038 21.09,102.983 D172.4@21.37,102.703
NetD143_1: D143.1 D173.4 | length 3.7
  Top Layer w0.09: D143.1@23.086,106.098 23.26,105.925 23.26,105.791 23.366,105.684 23.366,105.604 23.556,105.414 23.556,103.121 23.64,103.038 23.64,102.983 D173.4@23.92,102.703
NetD144_1: D144.1 D174.4 | length 3.7
  Top Layer w0.09: D144.1@25.609,106.088 25.625,106.088 25.81,105.903 25.81,105.888 25.92,105.778 25.92,105.738 26.079,105.578 26.079,103.111 26.163,103.028 26.163,102.973 D174.4@26.443,102.693
NetD145_1: D145.1 D175.4 | length 3.8
  Top Layer w0.09: D145.1@28.086,106.088 28.125,106.088 28.31,105.903 28.31,105.865 28.42,105.755 28.42,105.738 28.556,105.601 28.556,103.111 28.64,103.028 28.64,102.973 D175.4@28.92,102.693
NetD146_1: D146.1 D176.4 | length 3.8
  Top Layer w0.09: D146.1@30.686,106.088 30.86,105.915 30.86,105.791 30.966,105.684 30.966,105.582 31.05,105.499 31.05,104.858 31.117,104.79 31.117,104.294 31.05,104.226 31.05,103.38 31.16,103.27 31.16,103.267 31.263,103.163 31.267,103.163 31.383,103.046 31.383,102.829 D176.4@31.52,102.693
NetD147_1: D147.1 D177.4 | length 3.7
  Top Layer w0.09: D147.1@33.236,106.088 33.41,105.915 33.41,105.791 33.516,105.684 33.516,105.594 33.611,105.499 33.611,105.444 33.706,105.349 33.706,104.705 33.698,104.696 33.698,104.388 33.706,104.379 33.706,103.111 33.79,103.028 33.79,102.973 D177.4@34.07,102.693
NetD148_1: D148.1 D178.4 | length 3.7
  Top Layer w0.09: D148.1@35.786,106.098 35.96,105.925 35.96,105.791 36.066,105.684 36.066,105.604 36.256,105.414 36.256,103.121 36.34,103.038 36.34,102.983 D178.4@36.62,102.703
NetD149_1: D149.1 D179.4 | length 3.7
  Top Layer w0.09: D149.1@38.236,106.098 38.425,105.909 38.425,105.77 38.516,105.679 38.516,105.604 38.706,105.414 38.706,103.121 38.79,103.038 38.79,102.983 D179.4@39.07,102.703
NetD150_1: D150.1 D180.4 | length 3.7
  Top Layer w0.09: D150.1@-35.26,103.593 -34.98,103.313 -34.98,103.099 -34.845,102.964 -34.845,100.937 -34.79,100.882 -34.79,100.793 -34.71,100.713 -34.71,100.533 D180.4@-34.43,100.253
NetD151_1: D151.1 D181.4 | length 3.7
  Top Layer w0.09: D151.1@-32.793,103.593 -32.513,103.313 -32.513,103.099 -32.385,102.971 -32.385,100.876 -32.34,100.832 -32.34,100.777 -32.26,100.697 -32.26,100.483 D181.4@-31.98,100.203
NetD152_1: D152.1 D182.4 | length 3.7
  Top Layer w0.09: D152.1@-30.267,103.593 -29.987,103.313 -29.987,103.099 -29.907,103.019 -29.907,100.808 -29.76,100.66 -29.76,100.53 D182.4@-29.48,100.25
NetD153_1: D153.1 D183.4 | length 3.7
  Top Layer w0.09: D153.1@-27.71,103.583 -27.43,103.303 -27.43,103.089 -27.35,103.009 -27.35,100.929 -27.024,100.603 -27.024,100.341 D183.4@-26.923,100.24
NetD154_1: D154.1 D184.4 | length 3.7
  Top Layer w0.09: D154.1@-25.16,103.583 -24.88,103.303 -24.88,103.089 -24.694,102.902 -24.694,100.621 -24.61,100.538 -24.61,100.477 -24.506,100.373 -24.5,100.373 -24.373,100.245 D184.4@-24.373,100.24
NetD155_1: D155.1 D185.4 | length 3.7
  Top Layer w0.09: D155.1@-22.621,103.543 -22.451,103.373 -22.451,103.318 -22.341,103.208 -22.341,103.049 -22.261,102.969 -22.261,100.86 -22.097,100.697 -22.097,100.464 -22.006,100.373 -21.987,100.373 -21.833,100.219 D185.4@-21.833,100.2
NetD156_1: D156.1 D186.4 | length 3.7
  Top Layer w0.09: D156.1@-20.107,103.568 -20.095,103.568 -19.94,103.413 -19.94,103.401 -19.83,103.291 -19.83,103.248 -19.64,103.058 -19.64,100.671 -19.557,100.588 -19.557,100.476 -19.505,100.423 -19.447,100.423 -19.32,100.295 D186.4@-19.32,100.225
NetD157_1: D157.1 D187.4 | length 3.7
  Top Layer w0.09: D157.1@-17.557,103.568 -17.554,103.568 -17.386,103.399 -17.386,103.396 -17.276,103.286 -17.276,103.235 -17.09,103.049 -17.09,101.34 -17.093,101.338 -17.093,100.825 -17.013,100.745 -17.013,100.474 -16.96,100.422 -16.903,100.422 -16.77,100.288 D187.4@-16.77,100.225
NetD158_1: D158.1 D188.4 | length 3.7
  Top Layer w0.09: D158.1@-15.012,103.581 -15.009,103.581 -14.84,103.413 -14.84,103.41 -14.73,103.3 -14.73,103.089 -14.65,103.009 -14.65,100.87 -14.477,100.697 -14.477,100.491 -14.367,100.381 -14.367,100.373 -14.233,100.239 D188.4@-14.225,100.239
NetD159_1: D159.1 D189.4 | length 3.7
  Top Layer w0.09: D159.1@-12.487,103.584 -12.35,103.447 -12.35,103.233 -12.072,102.956 -12.072,102.018 -12.094,101.996 -12.094,101.5 -12.072,101.478 -12.072,100.672 -11.937,100.537 -11.937,100.479 -11.83,100.372 -11.827,100.372 -11.7,100.245 D189.4@-11.7,100.242
NetD160_1: D160.1 D190.4 | length 3.7
  Top Layer w0.09: D160.1@-9.91,103.533 -9.63,103.253 -9.63,103.039 -9.44,102.849 -9.44,100.817 -9.31,100.687 -9.31,100.416 -9.258,100.363 -9.2,100.363 -9.123,100.285 D190.4@-9.123,100.19
NetD161_1: D161.1 D191.4 | length 3.7
  Top Layer w0.09: D161.1@-7.36,103.533 -7.135,103.308 -7.135,103.253 -7,103.118 -7,102.962 -6.999,102.96 -6.999,102.448 -7,102.447 -7,100.963 -6.89,100.853 -6.89,100.767 -6.668,100.544 -6.668,100.285 D191.4@-6.573,100.19
NetD162_1: D162.1 D192.4 | length 3.7
  Top Layer w0.09: D162.1@-4.81,103.533 -4.64,103.363 -4.64,103.308 -4.45,103.118 -4.45,102.962 -4.449,102.96 -4.449,102.448 -4.45,102.447 -4.45,100.923 -4.34,100.813 -4.34,100.727 -4.118,100.504 -4.118,100.285 D192.4@-4.023,100.19
NetD163_1: D163.1 D193.4 | length 3.7
  Top Layer w0.09: D163.1@-2.31,103.573 -2.14,103.403 -2.14,103.348 -1.95,103.158 -1.95,103.002 -1.949,103 -1.949,102.488 -1.95,102.487 -1.95,100.973 -1.84,100.863 -1.84,100.777 -1.618,100.554 -1.618,100.325 D193.4@-1.523,100.23
NetD164_1: D164.1 D194.4 | length 3.7
  Top Layer w0.09: D164.1@0.2,103.59 0.338,103.453 0.338,103.239 0.67,102.907 0.67,102.504 0.683,102.492 0.683,100.817 0.905,100.594 0.905,100.331 D194.4@0.988,100.248
NetD165_1: D165.1 D195.4 | length 3.7
  Top Layer w0.09: D165.1@2.79,103.583 2.927,103.445 2.927,103.231 3.15,103.009 3.15,100.89 3.445,100.594 3.445,100.372 D195.4@3.577,100.24
NetD166_1: D166.1 D196.4 | length 3.7
  Top Layer w0.09: D166.1@5.29,103.573 5.427,103.435 5.427,103.221 5.726,102.922 5.726,100.803 5.985,100.544 5.985,100.322 D196.4@6.077,100.23
NetD167_1: D167.1 D197.4 | length 3.7
  Top Layer w0.09: D167.1@7.833,103.573 7.97,103.435 7.97,103.221 8.25,102.942 8.25,100.837 8.532,100.554 8.532,100.318 D197.4@8.62,100.23
NetD168_1: D168.1 D198.4 | length 3.7
  Top Layer w0.09: D168.1@10.39,103.573 10.527,103.435 10.527,103.221 10.75,102.999 10.75,100.973 10.86,100.863 10.86,100.777 11.082,100.554 11.082,100.325 D198.4@11.177,100.23
NetD169_1: D169.1 D199.4 | length 3.7
  Top Layer w0.09: D169.1@12.89,103.533 13.06,103.363 13.06,103.308 13.25,103.118 13.25,102.962 13.251,102.96 13.251,102.448 13.36,102.34 13.36,100.727 13.582,100.504 13.582,100.285 D199.4@13.677,100.19
NetD170_1: D170.1 D200.4 | length 3.7
  Top Layer w0.09: D170.1@15.49,103.533 15.66,103.363 15.66,103.308 15.85,103.118 15.85,102.962 15.851,102.96 15.851,102.448 15.85,102.447 15.85,100.923 15.96,100.813 15.96,100.727 16.182,100.504 16.182,100.285 D200.4@16.277,100.19
NetD171_1: D171.1 D201.4 | length 3.7
  Top Layer w0.09: D171.1@17.99,103.473 18.127,103.335 18.127,103.121 18.405,102.844 18.405,100.735 18.685,100.454 18.685,100.222 D201.4@18.777,100.13
NetD172_1: D172.1 D202.4 | length 3.7
  Top Layer w0.09: D172.1@20.54,103.533 20.677,103.395 20.677,103.181 20.9,102.959 20.9,101.782 20.921,101.761 20.921,100.798 21.225,100.494 21.225,100.292 D202.4@21.327,100.19
NetD173_1: D173.1 D203.4 | length 3.7
  Top Layer w0.09: D173.1@23.09,103.533 23.227,103.395 23.227,103.181 23.45,102.959 23.45,101.791 23.478,101.762 23.478,100.808 23.782,100.504 23.782,100.285 D203.4@23.877,100.19
NetD174_1: D174.1 D204.4 | length 3.7
  Top Layer w0.09: D174.1@25.613,103.523 25.75,103.385 25.75,103.171 25.973,102.949 25.973,100.923 26.083,100.813 26.083,100.727 26.305,100.504 26.305,100.275 D204.4@26.4,100.18
NetD175_1: D175.1 D205.4 | length 3.7
  Top Layer w0.09: D175.1@28.09,103.523 28.227,103.385 28.227,103.171 28.45,102.949 28.45,101.786 28.478,101.757 28.478,100.808 28.782,100.504 28.782,100.275 D205.4@28.877,100.18
NetD176_1: D176.1 D206.4 | length 3.7
  Top Layer w0.09: D176.1@30.69,103.523 30.86,103.353 30.86,103.298 31.05,103.108 31.05,102.952 31.051,102.95 31.051,102.438 31.05,102.437 31.05,102.415 31.063,102.401 31.063,101.905 31.05,101.891 31.05,100.777 31.332,100.494 31.332,100.313 D206.4@31.465,100.18
NetD177_1: D177.1 D207.4 | length 3.7
  Top Layer w0.09: D177.1@33.24,103.523 33.377,103.385 33.377,103.171 33.6,102.949 33.6,100.906 33.703,100.803 33.703,100.717 33.925,100.494 33.925,100.282 D207.4@34.027,100.18
NetD178_1: D178.1 D208.4 | length 3.7
  Top Layer w0.09: D178.1@35.79,103.533 35.927,103.395 35.927,103.181 36.15,102.959 36.15,101.786 36.178,101.757 36.178,100.798 36.482,100.494 36.482,100.285 D208.4@36.577,100.19
NetD179_1: D179.1 D209.4 | length 3.7
  Top Layer w0.09: D179.1@38.24,103.533 38.377,103.395 38.377,103.181 38.6,102.959 38.6,101.811 38.628,101.782 38.628,100.848 38.932,100.544 38.932,100.285 D209.4@39.027,100.19
NetD210_1: D210.1 D240.4 | length 3.8
  Top Layer w0.09: D210.1@-35.411,93.436 -34.941,92.966 -34.941,90.774 -34.877,90.71 -34.877,90.627 -34.774,90.523 -34.691,90.523 -34.632,90.464 -34.632,90.196 D240.4@-34.494,90.058
NetD211_1: D211.1 D241.4 | length 3.8
  Top Layer w0.09: D211.1@-32.847,93.431 -32.337,92.921 -32.337,90.677 -32.234,90.573 -32.182,90.573 -32.068,90.459 -32.068,90.191 D241.4@-31.93,90.053
NetD211_3: D211.4 D330.1 | length 16.4
  Top Layer w0.09: D330.1@-35.324,83.288 -35.044,83.008 -35.044,82.794 -34.964,82.714 -34.964,82.312 -34.75,82.098 -33.956,82.098 -33.709,82.345 -33.709,93.62 -33.518,93.811 -32.454,93.811 -32.401,93.758 -32.401,93.253 -32.119,92.971 -32.119,92.791 -32.144,92.765 D211.4@-32.147,92.765
NetD212_1: D212.1 D242.4 | length 3.8
  Top Layer w0.09: D212.1@-30.347,93.381 -29.877,92.911 -29.877,90.719 -29.813,90.655 -29.813,90.643 -29.694,90.523 -29.682,90.523 -29.568,90.409 -29.568,90.141 D242.4@-29.43,90.003
NetD212_3: D212.4 D331.1 | length 16.4
  Top Layer w0.09: D331.1@-32.76,83.283 -32.48,83.003 -32.48,82.789 -32.4,82.709 -32.4,82.307 -32.187,82.093 -31.392,82.093 -31.145,82.34 -31.145,89.544 -31.227,89.626 -31.227,89.935 -31.145,90.017 -31.145,93.615 -30.949,93.811 -29.89,93.811 -29.837,93.758 -29.837,93.175 -29.615,92.952 -29.615,92.771 -29.604,92.76 D212.4@-29.583,92.76
NetD213_1: D213.1 D243.4 | length 3.8
  Top Layer w0.09: D213.1@-27.797,93.431 -27.327,92.961 -27.327,90.769 -27.257,90.699 -27.257,90.677 -27.154,90.573 -27.132,90.573 -27.018,90.459 -27.018,90.191 D243.4@-26.88,90.053
NetD213_3: D213.4 D332.1 | length 16.8
  Top Layer w0.09: D332.1@-30.26,83.233 -29.98,82.953 -29.98,82.739 -29.9,82.659 -29.9,82.257 -29.687,82.043 -28.892,82.043 -28.645,82.29 -28.645,86.662 -28.735,86.751 -28.735,87.059 -28.645,87.149 -28.645,87.346 -28.798,87.5 -28.798,88.146 -28.851,88.199 -28.851,88.507 -28.798,88.56 -28.798,89.052 -28.807,89.061 -28.807,90.338 -28.85,90.381 -28.85,90.403 -28.867,90.42 -28.867,90.706 -28.649,90.924 -28.645,90.924 -28.645,91.436 -28.735,91.526 -28.735,91.834 -28.645,91.923 -28.645,93.565 -28.399,93.811 -27.471,93.811 -27.257,93.597 -27.257,93.195 -27.115,93.052 -27.115,92.721 -27.104,92.71 D213.4@-27.083,92.71
NetD214_1: D214.1 D244.4 | length 3.7
  Top Layer w0.09: D214.1@-25.287,93.351 -25.12,93.351 -25.05,93.281 -25.05,93.099 -24.827,92.877 -24.827,92.764 -24.717,92.654 -24.717,90.677 -24.495,90.454 -24.495,90.098 D244.4@-24.48,90.083
NetD214_3: D214.4 D333.1 | length 16.3
  Top Layer w0.09: D333.1@-27.71,83.283 -27.43,83.003 -27.43,82.789 -27.35,82.709 -27.35,82.307 -27.137,82.093 -26.376,82.093 -26.249,82.22 -26.215,82.22 -26.095,82.34 -26.095,89.331 -26.102,89.338 -26.102,89.834 -26.095,89.841 -26.095,93.615 -25.899,93.811 -24.931,93.811 -24.787,93.667 -24.787,93.106 -24.637,92.956 -24.637,92.843 -24.554,92.76 D214.4@-24.533,92.76
NetD215_1: D215.1 D245.4 | length 3.8
  Top Layer w0.09: D215.1@-22.747,93.461 -22.207,92.921 -22.207,90.707 -21.968,90.467 -21.968,90.221 D245.4@-21.83,90.083
NetD215_3: D215.4 D334.1 | length 16.3
  Top Layer w0.09: D334.1@-25.31,83.283 -25.03,83.003 -25.03,82.789 -24.95,82.709 -24.95,82.307 -24.737,82.093 -23.942,82.093 -23.77,82.265 -23.77,85.36 -23.877,85.467 -23.877,85.776 -23.77,85.883 -23.77,90.568 -23.695,90.644 -23.695,91.896 -23.145,92.446 -23.145,93.758 -23.092,93.811 -22.391,93.811 -22.177,93.597 -22.177,93.195 -22.017,93.035 D215.4@-22.017,92.76
NetD216_1: D216.1 D246.4 | length 3.8
  Top Layer w0.09: D216.1@-20.165,93.498 -20.154,93.498 -19.937,93.281 -19.937,93.27 -19.827,93.16 -19.827,93.116 -19.637,92.926 -19.637,90.677 -19.625,90.665 -19.625,90.506 -19.557,90.438 -19.557,90.429 -19.447,90.319 -19.447,90.273 -19.294,90.12 D246.4@-19.248,90.12
NetD216_3: D216.4 D335.1 | length 16.7
  Top Layer w0.09: D335.1@-22.647,83.283 -22.367,83.003 -22.367,82.948 -22.287,82.868 -22.287,82.307 -22.074,82.093 -21.279,82.093 -21.032,82.34 -21.032,85.61 -20.785,85.857 -20.785,86.476 -21.032,86.723 -21.032,88.761 -21.157,88.886 -21.157,89.732 -21.032,89.857 -21.032,90.601 -20.903,90.73 -20.903,91.038 -21.032,91.167 -21.032,93.615 -20.836,93.811 -19.848,93.811 -19.637,93.6 -19.637,93.195 -19.447,93.005 D216.4@-19.447,92.76
NetD217_1: D217.1 D247.4 | length 3.8
  Top Layer w0.09: D217.1@-17.651,93.522 -17.638,93.522 -17.397,93.281 -17.397,93.268 -17.287,93.158 -17.287,93.116 -17.123,92.952 -17.123,90.701 -17.111,90.689 -17.111,90.532 -16.959,90.38 -16.959,90.325 -16.778,90.144 D247.4@-16.734,90.144
NetD217_3: D217.4 D336.1 | length 16.3
  Top Layer w0.09: D336.1@-20.11,83.283 -19.83,83.003 -19.83,82.948 -19.75,82.868 -19.75,82.307 -19.537,82.093 -18.742,82.093 -18.495,82.34 -18.495,89.003 -18.567,89.075 -18.567,89.383 -18.495,89.455 -18.495,93.562 -18.247,93.811 -17.311,93.811 -17.187,93.687 -17.187,93.327 -17.097,93.237 -17.097,93.195 -16.933,93.03 D217.4@-16.933,92.76
NetD218_1: D218.1 D248.4 | length 3.8
  Top Layer w0.09: D218.1@-15.172,93.448 -14.644,92.92 -14.644,90.627 -14.367,90.35 -14.367,90.182 D248.4@-14.255,90.07
NetD218_3: D218.4 D337.1 | length 16.5
  Top Layer w0.09: D337.1@-17.567,83.26 -17.287,82.98 -17.287,82.925 -17.207,82.845 -17.207,82.284 -16.994,82.07 -16.199,82.07 -15.952,82.317 -15.952,88.983 -15.793,89.143 -15.793,89.477 -15.952,89.637 -15.952,89.844 -15.972,89.864 -15.972,90.172 -15.952,90.192 -15.952,93.601 -15.742,93.811 -14.771,93.811 -14.667,93.707 -14.667,93.577 -14.644,93.554 -14.644,93.189 -14.422,92.967 -14.422,92.748 -14.411,92.737 D218.4@-14.39,92.737
NetD219_1: D219.1 D249.4 | length 3.7
  Top Layer w0.09: D219.1@-12.6,93.453 -12.072,92.925 -12.072,90.632 -11.827,90.387 -11.827,90.273 D249.4@-11.683,90.128
NetD219_3: D219.4 D338.1 | length 16.7
  Top Layer w0.09: D338.1@-15.006,83.194 -14.726,82.914 -14.726,82.859 -14.646,82.779 -14.646,82.217 -14.432,82.004 -13.638,82.004 -13.266,82.376 -13.266,87.753 -13.119,87.899 -13.119,88.208 -13.14,88.229 -13.14,88.957 -13.074,89.023 -13.074,90.848 -13.266,91.039 -13.266,93.758 -13.213,93.811 -12.231,93.811 -12.127,93.707 -12.127,93.532 -12.083,93.488 -12.083,93.205 -11.828,92.95 D219.4@-11.828,92.671
NetD220_1: D220.1 D250.4 | length 3.7
  Top Layer w0.09: D220.1@-10.047,93.461 -9.477,92.891 -9.477,90.518 -9.397,90.438 -9.397,90.383 D250.4@-9.13,90.116
NetD220_3: D220.4 D339.1 | length 16.8
  Top Layer w0.09: D339.1@-12.534,83.157 -12.254,82.877 -12.254,82.822 -12.174,82.742 -12.174,82.181 -11.96,81.967 -11.166,81.967 -10.918,82.214 -10.918,82.544 -10.875,82.588 -10.875,82.896 -10.918,82.939 -10.918,85.527 -10.56,85.885 -10.56,86.949 -10.778,87.167 -10.778,88.113 -10.56,88.331 -10.56,89.782 -10.516,89.826 -10.516,90.134 -10.56,90.178 -10.56,90.388 -10.588,90.415 -10.588,93.731 -10.508,93.811 -9.691,93.811 -9.489,93.609 -9.489,93.207 -9.287,93.005 D220.4@-9.287,92.634
NetD221_1: D221.1 D251.4 | length 3.7
  Top Layer w0.09: D221.1@-7.494,93.461 -7.041,93.007 -7.041,90.78 -6.715,90.454 -6.715,90.241 D251.4@-6.577,90.103
NetD221_3: D221.4 D340.1 | length 16.4
  Top Layer w0.09: D340.1@-9.964,83.217 -9.684,82.937 -9.684,82.882 -9.604,82.802 -9.604,82.241 -9.39,82.027 -8.596,82.027 -8.348,82.274 -8.348,93.549 -8.115,93.783 -8.041,93.783 -8.013,93.811 -7.151,93.811 -7.041,93.7 -7.041,93.276 -6.819,93.054 -6.819,92.705 -6.808,92.694 D221.4@-6.786,92.694
NetD222_1: D222.1 D252.4 | length 3.8
  Top Layer w0.09: D222.1@-4.954,93.461 -4.509,93.015 -4.509,92.878 -4.507,92.877 -4.507,90.822 -4.397,90.712 -4.397,90.677 -4.175,90.454 -4.175,90.221 D252.4@-4.037,90.083